# EAGLE board CSR8645-VFBGA275um-V1 (EAGLE 7.2.0)
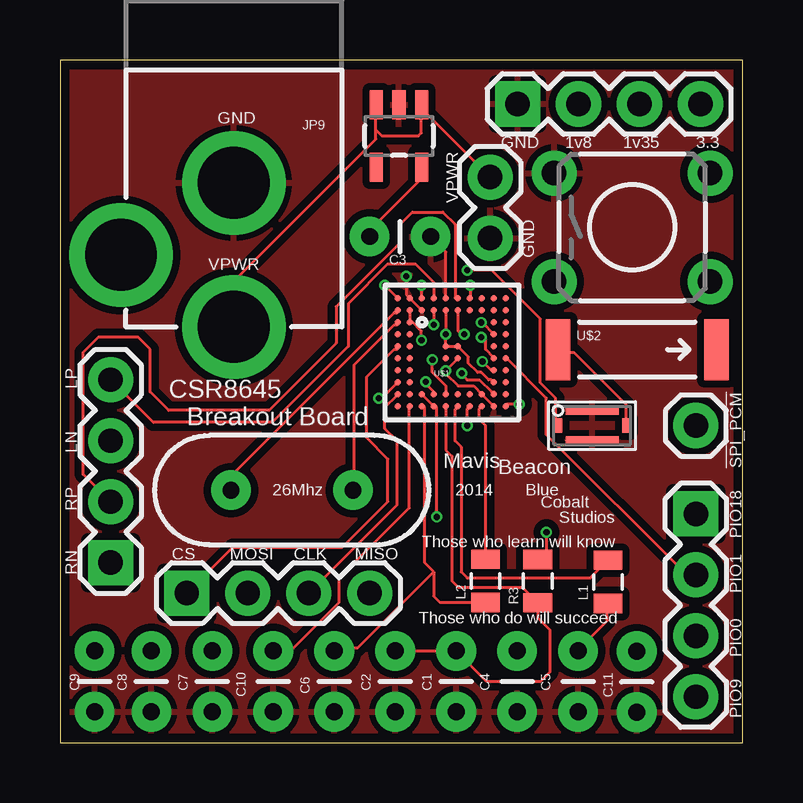
[diagram p0: board, top side]
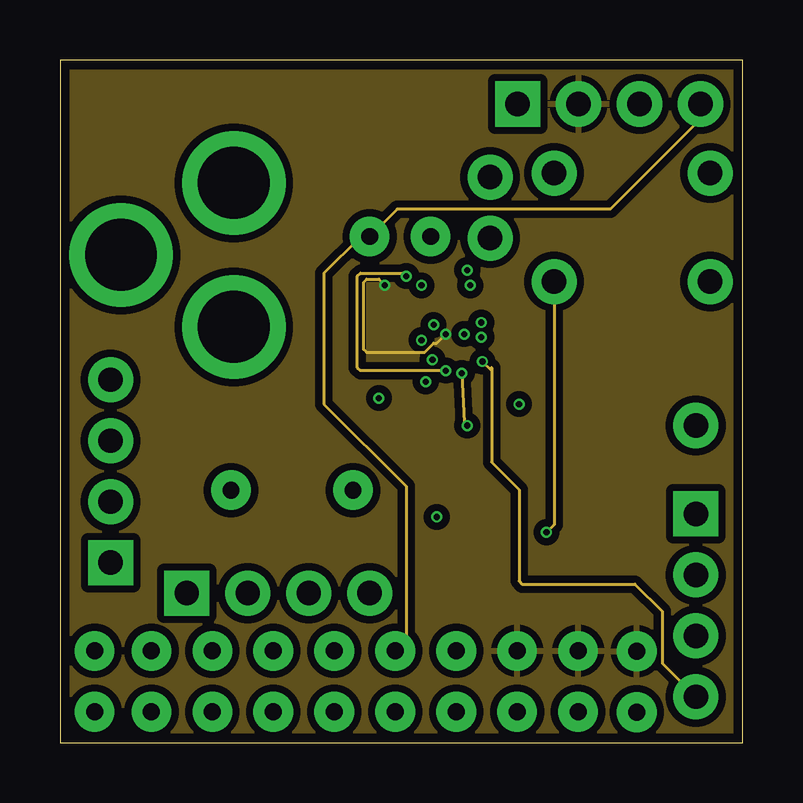
[diagram p1: board, inner layer Route2]
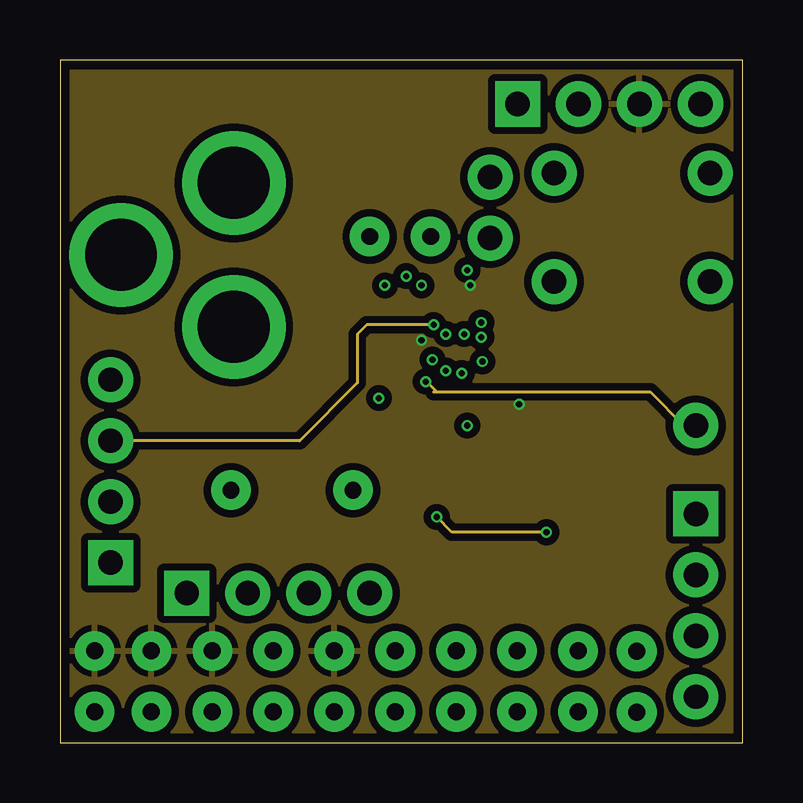
[diagram p2: board, inner layer Route15]
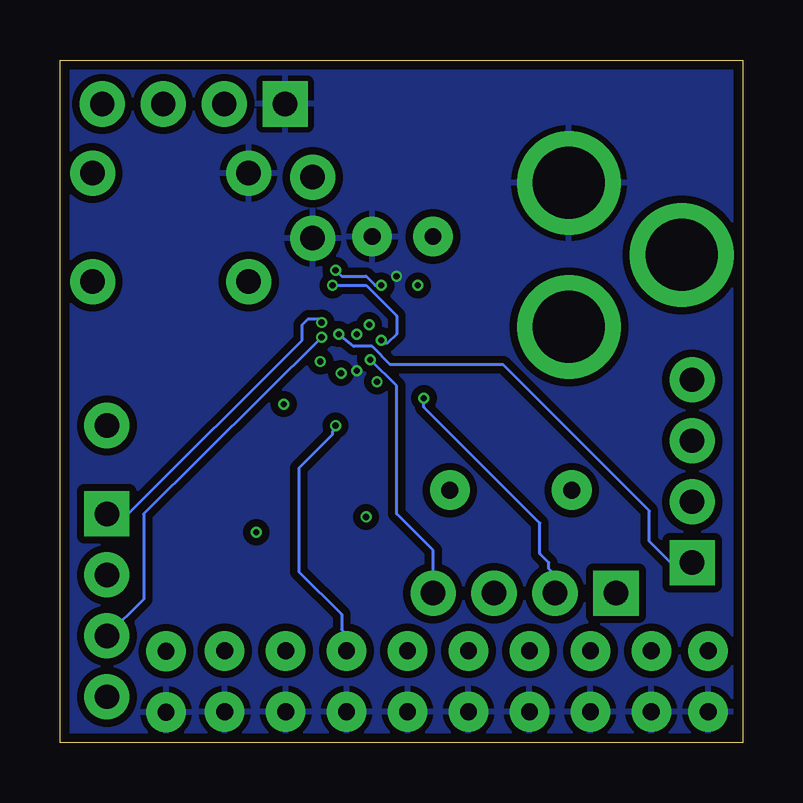
[diagram p3: board, bottom side, seen from below]

Size 28.45 x 28.44 mm. Coordinates in mm from the lower left corner, seen from the top.
Outline: 0,0 28.45,0 28.45,28.44 0,28.44 0,0
Copper layers (1*2*15*16): Top 0.035559375mm / dielectric 0.17018125mm / Route2 0.01778125mm / dielectric 47mil / Route15 0.01778125mm / dielectric 0.17018125mm / Bottom 0.035559375mm
Design rules "OSHPark-4layer": minimum track width 5mil, minimum drill 10mil, track to track 5mil, track to pad 5mil, pad to pad 5mil, via to via 5mil, smd to smd 5mil, copper to edge 15mil, drill to drill 6mil, minimum pad ring 4mil, minimum via ring 4mil, stop-mask expansion 4mil, vias tented up to drill 0mil, thermal gap 10mil

## Footprints (pad centres in the part's own frame; a part is rotated, then mirrored left to right if it is on the bottom)
CAP-PTH-SMALL = drill 0.7 pad 1.651: 1 0,0; 2 2.54,0
1X04 = drill 1.016 pad 1.88 square: 1 0,0 | drill 1.016 pad 1.88: 2 2.54,0; 3 5.08,0; 4 7.62,0
1X01 = drill 1.016 pad 1.88: 1 0,0
POWER_JACK_PTH = drill 2.997 pad 4.318: GND 0,7.7; GNDBREAK 4.7,10.7; PWR 0,13.7
1X02 = drill 1.016 pad 1.88: 1 0,0; 2 2.54,0
0805 = smd 0.8 x 1.2: 1 -0.9,0; 2 0.9,0
TACTILE-PTH = drill 1.016 pad 1.88: 1 -3.251,2.261; 2 3.251,2.261; 3 -3.251,-2.261; 4 3.251,-2.261
SOT23-5 = smd 0.55 x 1.2: 1 -0.95,-1.3; 2 0,-1.3; 3 0.95,-1.3; 4 0.95,1.3; 5 -0.95,1.3
RF_FILTER = smd 2.2 x 0.35: 1 0,0.625; 3 0,-0.625 | smd 0.35 x 0.6: 2 1.425,0; 4 -1.425,0
VFBGA68-LARGE = smd 0.275 x 0.275: A1 -2.25,2.25; A2 -1.75,2.25; A3 -1.25,2.25; A4 -0.75,2.25; A5 -0.25,2.25; A6 0.25,2.25; A7 0.75,2.25; A8 1.25,2.25; A9 1.75,2.25; A10 2.25,2.25; B1 -2.25,1.75; B2 -1.75,1.75; B3 -1.25,1.75; B4 -0.75,1.75; B5 -0.25,1.75; B6 0.25,1.75; B7 0.75,1.75; B8 1.25,1.75; B9 1.75,1.75; B10 2.25,1.75; C1 -2.25,1.25; C2 -1.75,1.25; C9 1.75,1.25; C10 2.25,1.25; D1 -2.25,0.75; D2 -1.75,0.75; D9 1.75,0.75; D10 2.25,0.75; E1 -2.25,0.25; E2 -1.75,0.25; E5 -0.25,0.25; E6 0.25,0.25; E9 1.75,0.25; E10 2.25,0.25; F1 -2.25,-0.25; F2 -1.75,-0.25; F5 -0.25,-0.25; F6 0.25,-0.25; F9 1.75,-0.25; F10 2.25,-0.25; G1 -2.25,-0.75; G2 -1.75,-0.75; G9 1.75,-0.75; G10 2.25,-0.75; H1 -2.25,-1.25; H2 -1.75,-1.25; H9 1.75,-1.25; H10 2.25,-1.25; J1 -2.25,-1.75; J2 -1.75,-1.75; J3 -1.25,-1.75; J4 -0.75,-1.75; J5 -0.25,-1.75; J6 0.25,-1.75; J7 0.75,-1.75; J8 1.25,-1.75; J9 1.75,-1.75; J10 2.25,-1.75; K1 -2.25,-2.25; K2 -1.75,-2.25; K3 -1.25,-2.25; K4 -0.75,-2.25; K5 -0.25,-2.25; K6 0.25,-2.25; K7 0.75,-2.25; K8 1.25,-2.25; K9 1.75,-2.25; K10 2.25,-2.25
ANTENNA-CHIP5 = smd 1.016 x 2.54: FEED -3.302,0; NC 3.302,0
HC49US = drill 0.7 pad 1.651: 1 -2.54,0; 2 2.54,0

## Placement (x,y rotation side)
C1  2.2u  [CAP-PTH-SMALL]  16.51,1.28 90 top
C2  2.2u  [CAP-PTH-SMALL]  13.97,1.28 90 top
C3  2.2u  [CAP-PTH-SMALL]  15.44,21.08 180 top
C4  2.2u  [CAP-PTH-SMALL]  19.05,1.28 90 top
C5  10n  [CAP-PTH-SMALL]  21.59,1.28 90 top
C6  10n  [CAP-PTH-SMALL]  11.43,1.28 90 top
C7  4.7u  [CAP-PTH-SMALL]  6.35,1.28 90 top
C8  15p  [CAP-PTH-SMALL]  3.81,1.28 90 top
C9  2.2u  [CAP-PTH-SMALL]  1.44,1.28 90 top
C10  470n  [CAP-PTH-SMALL]  8.89,1.28 90 top
C11  100n  [CAP-PTH-SMALL]  24.03,3.8 270 top
FRAME1  FRAME-LETTER  [CREATIVE_COMMONS]  120.22,86.87 0 top  (outside the outline)
JP1  [1X04]  26.49,9.53 270 top
JP2  [1X04]  2.11,7.49 90 top
JP3  M01PTH  [1X01]  26.49,13.21 0 top
JP6  [1X04]  5.28,6.22 0 top
JP9  POWER_JACKPTH  [POWER_JACK_PTH]  7.24,31.02 180 top
JP10  [1X04]  19.07,26.61 0 top
JP11  M02PTH  [1X02]  17.92,23.56 270 top
L1  4.7u  [0805]  22.83,6.69 90 top
L2  4.7u  [0805]  17.73,6.73 90 top
R3  1K  [0805]  19.9,6.72 270 top
S2  SWITCH-MOMENTARY-2PTH  [TACTILE-PTH]  23.84,21.46 0 top
U1  V_REG_LDOSMD  [SOT23-5]  14.12,25.27 180 top
U2  RF_CERAMIC_FILTER  [RF_FILTER]  22.17,13.21 0 top
U$1  CSR8645VFBGA-275UM  [VFBGA68-LARGE]  16.33,16.26 0 top
U$2  ANTENNA2SMD5  [ANTENNA-CHIP5]  24.05,16.37 0 top
Y1  26MHZ  [HC49US]  9.67,10.52 180 top

## Library data of the parts
C1-C11 L1 L2 = SparkFun-Passives
FRAME1 = SparkFun-Aesthetics
JP1-JP3 JP6 JP10 JP11 = SparkFun-Connectors
JP9 = SparkFun-Connectors; PROD_ID: CONN-08197
R3 = SparkFun-Resistors
S2 = SparkFun-Electromechanical
U1 = SparkFun-PowerIC
U2 U$2 = SparkFun-RF
U$1 = SparkFun-DigitalIC
Y1 = SparkFun-FreqCtrl

## Nets
1V8: C4.2 C5.2 C11.1 JP10.2 L1.1 U$1.A1 U$1.B5 U$1.E5 U$1.E6 U$1.H9
1V35: C6.2 C7.2 C8.2 C9.2 JP10.3 L2.1 U$1.A7 U$1.B2 U$1.C2 U$1.K3 U$1.K10
3.3V: C1.2 C2.2 C3.2 JP10.4 R3.2 U1.5 U$1.J9 U$1.K5 U$1.K7
!SPI_PCM: JP3.1 U$1.J4
BT_RF: U2.4 U$1.A3
GND: C1.1 C2.1 C3.1 C4.1 C5.1 C6.1 C7.1 C8.1 C9.1 C10.1 C11.2 JP9.GND JP10.1 JP11.2 S2.1 U1.2 U2.1 U2.3 U$1.A2 U$1.A5 U$1.B3 U$1.F6 U$1.J8 U$1.K9
N$1: JP1.3 U$1.F9
N$2: JP2.3 U$1.B4
N$3: L1.2 U$1.K6
N$4: L2.2 U$1.K8
N$5: U$1.C1 Y1.1
N$6: C10.2 U$1.K2
N$7: U$1.B1 Y1.2
N$8: JP1.2 U$1.F10
N$9: JP1.1 U$1.D9
N$10: JP2.4 U$1.A4
N$11: JP1.4 U$1.G9
N$12: JP2.2 U$1.A6
N$13: U2.2 U$2.FEED
N$14: JP2.1 U$1.B6
RSTB: R3.1 S2.3 U$1.J3 U$1.K4
SPI_CLK: JP6.3 U$1.J1
SPI_CS: JP6.1 U$1.E1
SPI_MISO: JP6.4 U$1.J5
SPI_MOSI: JP6.2 U$1.H1
VPWR: JP9.PWR JP11.1 U1.1 U1.3

## Tracks (layer width: path | path; a pad name or v marks a point on that pad's centre or on a via)
1V8  (via drill 0.25 pad 0.1)
  Top 0.127: U$1.E6 U$1.E5 v16.08,17.01 v16.08,17.02 U$1.B5 | U$1.E6 16.59,16.51 | U$1.H9 17.98,15.11 17.86,15.11 17.55,15.42 17.4,15.42 17.02,15.8 17.02,16.07 U$1.E6 | v13.54,19.05 U$1.A1 | L1.1 22.81,5.71 22.81,5.08 21.67,3.94 C5.2
  Route2 0.127: v13.54,19.05 13.28,19.3 12.78,19.3 12.65,19.18 12.65,16.38 12.78,16.26 15.19,16.26 15.57,16.64 15.7,16.64 v16.08,17.02
  pour Route2 (isolate 0.305): -0.05,28.32 28.4,28.32 28.4,27.94 28.4,0 -0.05,0
1V35  (via drill 0.25)
  Top 0.127: U$1.B2 U$1.C2 14.68,17.53 15.06,17.14 v15.06,16.76 | v19.13,14.1 18.62,14.1 U$1.K10 | v17.09,19.05 17.09,18.54 U$1.A7 | 15.57,7.11 15.19,7.49 15.19,13.97 U$1.K3 | L2.1 17.09,5.84 15.82,5.84 15.57,6.1 15.57,7.11 | 15.57,7.11 12.4,3.94 11.51,3.94 C6.2
  Bottom 0.127: v15.06,16.76 14.94,16.64 14.81,16.64 14.43,17.02 14.43,17.78 15.7,19.05 v17.09,19.05
  pour Route15 (isolate 0.305): 0.2,28.32 28.4,28.32 28.4,28.07 28.4,-0.13 -0.05,-0.13 -0.05,0 -0.05,28.32
3.3V  (via drill 0.25 pad 0.1)
  Top 0.127: v16.97,13.21 16.97,13.89 U$1.K7 | C2.2 14.05,3.81 16.46,3.81 C1.2 17.79,2.54 20.02,2.54 20.4,2.92 20.4,4.7 19.9,5.19 R3.2 19.25,6.48 16.59,6.48 16.33,6.73 16.33,11.94 16.08,12.19 U$1.K5 | C3.2 12.9,21.34 14.94,23.37 14.94,23.75 15.06,23.88 U1.5 | U$1.J9 18.11,14.61 17.98,14.61 17.48,15.11 16.97,15.11 16.74,15.34 v16.74,15.39
  Route2 0.127: v16.74,15.39 16.84,13.33 v16.97,13.21 | JP10.4 26.69,25.97 22.94,22.22 14.05,22.22 C3.2 12.52,21.08 11,19.56 11,14.1 14.43,10.67 14.43,4.32 13.97,3.86 C2.2
  Bottom 0.127: v16.97,13.21 16.97,13.08 17.09,12.95 17.09,12.83 18.49,11.43 18.49,7.11 16.71,5.33 16.71,4.7 16.59,4.57 16.59,3.94 C1.2
!SPI_PCM  (via drill 0.25 pad 0.1)
  Top 0.127: U$1.J4 15.57,14.61 15.32,14.86 15.32,14.99 v15.24,15.04
  Route15 0.127: 15.57,14.61 15.7,14.61 | 15.7,14.61 24.59,14.61 25.98,13.21 JP3.1 | 15.7,14.61 15.32,14.99 v15.24,15.04
BT_RF  (via drill 0.25)
  Top 0.127: v15.06,19.05 15.06,18.54 U$1.A3 | v16.97,19.68 17.98,19.68 20.02,17.65 20.02,14.99 20.65,14.35 20.65,13.21 U2.4
  Bottom 0.127: v15.06,19.05 15.32,19.05 15.7,19.43 16.71,19.43 v16.97,19.68
GND  (via drill 0.25 pad 0.1)
  Top 0.127: U$1.J8 | U$1.F6 v16.08,15.49 16.08,15.37 16.59,14.86 17.23,14.86 U$1.J8 | v14.43,19.43 14.43,18.66 U$1.A2 U$1.B3 | U$1.A5 16.08,20.44 C3.1 | U$1.J8 U$1.K9 | U1.2 14.12,26.59 14.05,26.67
  Route2 0.127: v14.43,19.43 14.3,19.56 12.52,19.56 12.4,19.43 12.4,15.62 12.52,15.49 v16.08,15.49
  pour Bottom (isolate 0.305): -0.05,28.32 28.4,28.32 28.4,-0.13 -0.05,-0.13
  pour Top (isolate 0.305): -0.05,28.45 28.4,28.45 28.4,-0.13 -0.05,-0.13
N$1  (via drill 0.25 pad 0.1)
  Top 0.127: U$1.F9 18.08,16.03 17.73,16.38 17.73,16.76 v17.55,16.89
  Bottom 0.127: v17.55,16.89 24.97,9.53 24.97,5.97 JP1.3
N$2  (via drill 0.25 pad 0.1)
  Top 0.127: U$1.B4 15.58,17.41 v15.57,17.4
  Route15 0.127: JP2.3 9.98,12.57 12.4,14.99 12.4,17.02 12.78,17.4 v15.57,17.4
N$3
  Top 0.127: L1.2 22.09,6.86 16.97,6.86 16.71,7.11 16.71,12.32 16.46,12.57 16.46,13.88 U$1.K6
N$4
  Top 0.127: 17.48,13.97 U$1.K8 17.48,13.9 17.48,13.46 17.73,13.21 L2.2
N$5
  Top 0.127: U$1.C1 14.05,17.4 13.92,17.4 12.27,15.75 12.27,10.54 Y1.1
N$6
  Top 0.127: 14.55,13.97 U$1.K2 14.55,13.98 14.55,9.78 11.63,6.86 11.63,5.84 9.73,3.94 8.97,3.94 C10.2
N$7
  Top 0.127: U$1.B1 14.05,17.91 13.92,17.91 7.19,11.18 7.19,10.54 Y1.2
N$8
  Top 0.127: JP1.2 26.11,6.98 20.27,12.83 20.27,14.35 18.62,16 U$1.F10
N$9  (via drill 0.25)
  Top 0.127: 17.98,17.02 U$1.D9 17.59,17.5 v17.55,17.5
  Bottom 0.127: JP1.1 25.6,9.53 18.36,16.76 18.36,17.4 18.11,17.65 17.7,17.65 v17.55,17.5
N$10
  Top 0.127: 2.62,14.61 JP2.4 3.89,13.33 8.84,13.33 12.01,16.51 12.01,18.29 13.67,19.94 14.81,19.94 15.57,19.18 15.57,18.54 U$1.A4
N$11  (via drill 0.25 pad 0.1)
  Top 0.127: U$1.G9 18.08,15.52 17.96,15.52 v17.6,15.88
  Route2 0.127: 17.98,15.62 17.98,15.49 | 17.98,15.49 17.98,11.68 19.13,10.54 19.13,6.73 19.25,6.6 23.95,6.6 25.1,5.46 25.1,3.3 JP1.4 | 17.98,15.49 v17.6,15.88
N$12
  Top 0.127: JP2.2 0.97,11.18 0.97,16.26 1.6,16.89 3.25,16.89 3.76,16.38 3.76,14.61 4.52,13.84 8.71,13.84 11.51,16.64 11.51,18.16 14.17,20.83 14.17,21.59 14.68,22.1 15.95,22.1 16.46,21.59 16.46,18.54 U$1.A6
N$13
  Top 0.127: U2.2 23.57,13.21 23.57,14.1 21.41,16.26 20.78,16.26 U$2.FEED
N$14  (via drill 0.25)
  Top 0.127: v16.84,17.02 16.59,17.14 16.59,17.91 U$1.B6
  Bottom 0.127: v16.84,17.02 16.21,16.51 15.44,16.51 14.68,15.75 9.98,15.75 3.89,9.65 3.89,8.38 3,7.49 JP2.1
RSTB  (via drill 0.25, 0.25 pad 0.1)
  Top 0.127: U$1.J3 U$1.K4 15.7,13.97 v15.7,9.4 | v20.27,8.76 20.27,7.99 R3.1
  Route2 0.127: S2.3 20.59,9.08 v20.27,8.76
  Route15 0.127: v20.27,8.76 16.33,8.76 v15.7,9.4
SPI_CLK
  Top 0.127: JP6.3 14.05,9.91 14.05,12.57 13.54,13.08 13.54,13.97 14.05,14.48 U$1.J1
SPI_CS
  Top 0.127: JP6.1 7.19,8.13 11.76,8.13 13.67,10.03 13.67,11.81 12.78,12.7 12.78,15.24 13.92,16.38 14.05,16.38 U$1.E1
SPI_MISO  (via drill 0.25)
  Top 0.127: U$1.J5 16.08,14.61 16.08,14.86 15.52,15.42 v15.52,15.95 15.52,15.57
  Bottom 0.127: v15.52,15.95 14.43,14.86 14.43,9.53 12.9,8 JP6.4
SPI_MOSI  (via drill 0.25)
  Top 0.127: v13.28,14.35 13.41,14.35 14.05,14.99 U$1.H1
  Bottom 0.127: v13.28,14.35 13.28,13.97 8.46,9.14 8.46,7.87 8.08,7.49 8.08,7.24 7.82,6.98 JP6.2
VPWR
  Top 0.127: 13.28,26.92 13.28,26.67 U1.3 13.16,26.54 13.16,25.53 | 15.19,26.67 U1.1 | U1.1 15.19,26.54 15.19,26.29 17.86,23.62 JP11.1 | 13.16,25.53 13.16,25.15 7.32,19.3 7.32,17.4 JP9.PWR | U1.1 15.06,26.56 15.06,25.4 14.94,25.27 13.41,25.27 13.16,25.53

## Text on the board
tPlace: GND | GND | 1v8 | 1v35 | 3.3 | VPWR | GND | VPWR | LP | CSR8645 | Breakout Board | LN | Mavis | Beacon | !SPI_PCM | 26Mhz | 2014 | Blue | Cobalt | RP | Studios | Those who learn will know | PIO18 | RN | CS | MOSI | CLK | MISO | PIO1 | Those who do will succeed | PIO0 | PIO9